# Altium PCB debugger.PcbDoc (part 2 of 2)
Units mm, origin at the board's own origin, x right, y up, seen from the top; angles counter-clockwise.
Board outline 42.72 x 30.76 mm, 2 copper layers (Top Layer, Bottom Layer); 55 components, 51 nets, 242 pads, 80 vias.
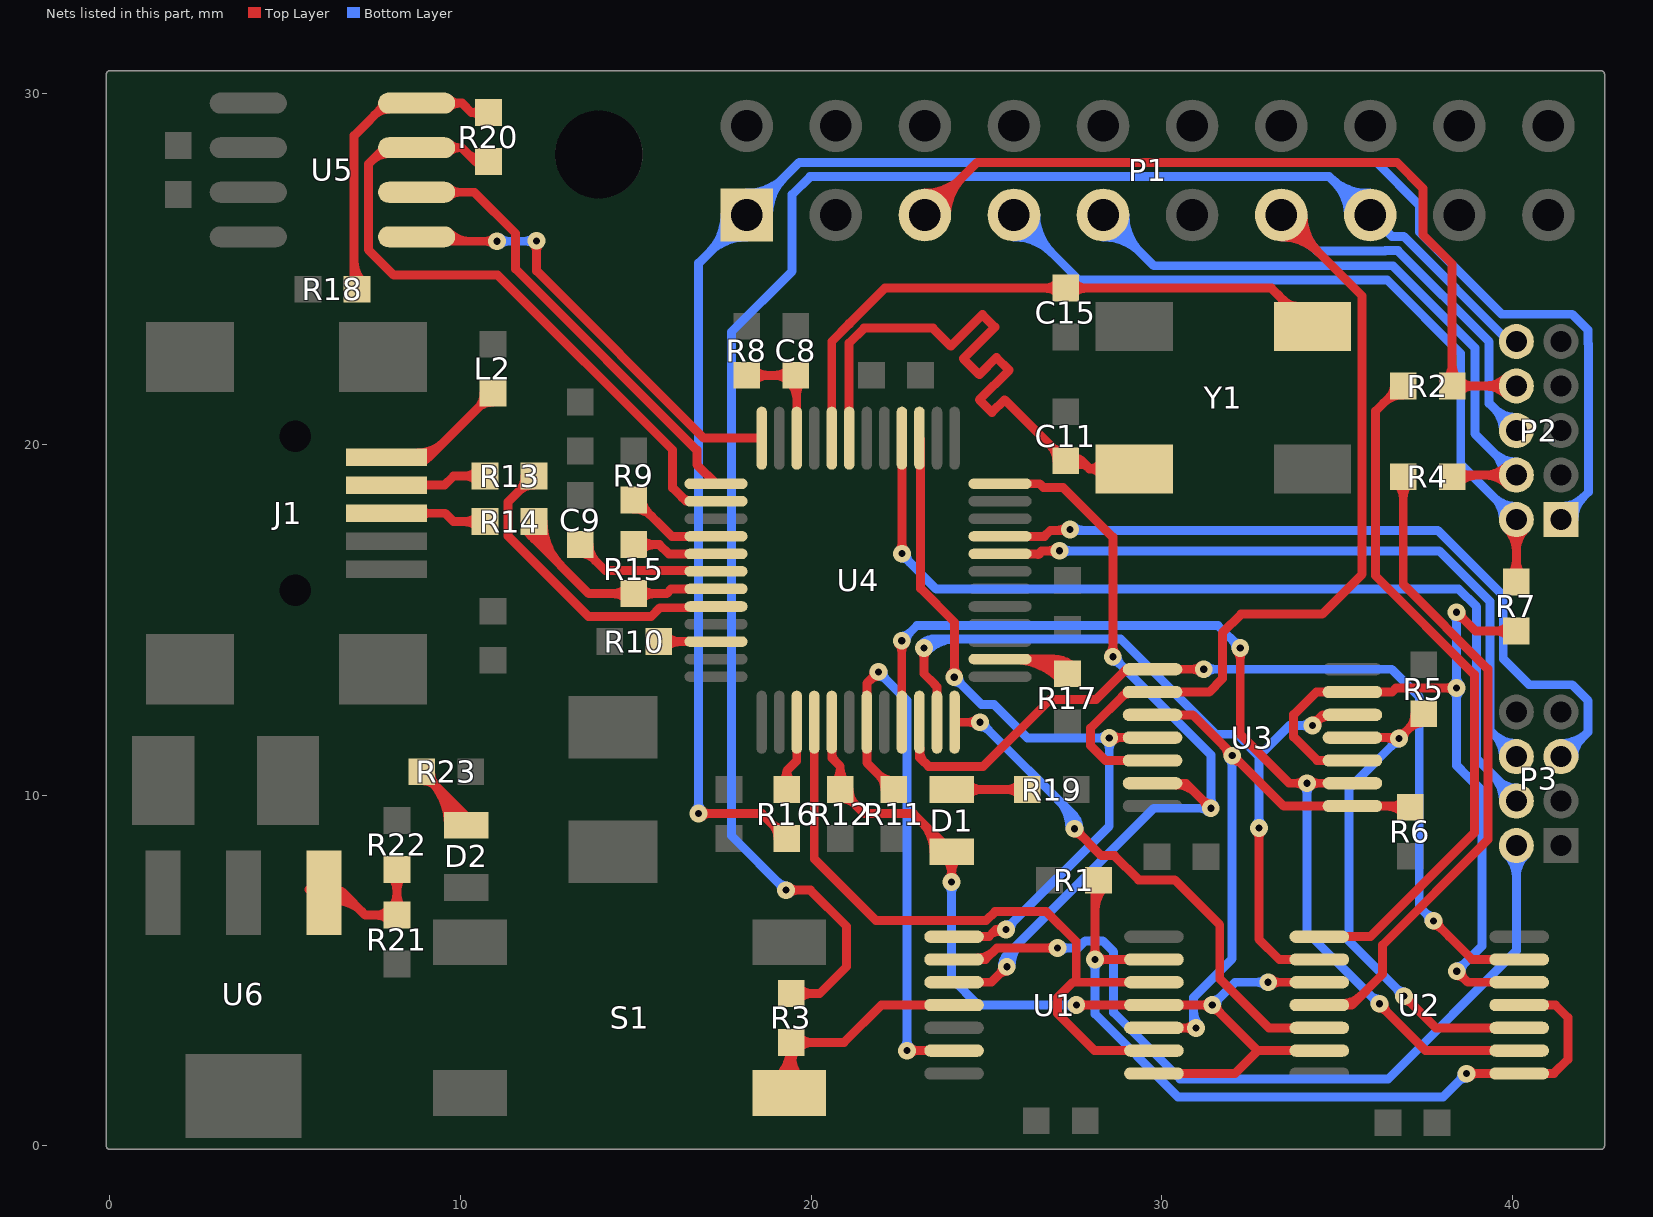
[diagram p2: the nets of this part, all layers, seen from the top]

## Via types
v1: diameter 0.508, hole 0.203, Top Layer to Bottom Layer, tented both sides, 80 vias

## Nets (pads, with @x,y where several pads share a name; then routed paths per layer and width w, separated by ;. In a path a pad name is that pad's centre, name@x,y a point inside that pad or via, vN(x,y) a via of type N, cw(c..) or ccw(c..) an arc to the next point about the centre after c; other vN are vias at no path point) (continued)
DBG1: P3.5 U4.33 | length 23.9
  Top Layer w0.254: U4.33@25.386,17.379 26.65,17.379 26.822,17.551 27.407,17.551 v1(27.381,17.577) ; 27.013,17.551 ccw(c27.013,17.945) v1@27.291,17.667
  Bottom Layer w0.254: v1(27.381,17.577) 27.407,17.551 37.864,17.551 39.734,15.682 39.734,13.886 40.473,13.147 41.698,13.147 42.154,12.692 42.154,11.801 P3.5@41.453,11.1 ; v1@27.471,17.667 ccw(c27.749,17.945) 27.749,17.551 ; P3.5@41.377,11.473 ccw(c41.377,12.557) 42.143,11.79 ; P3.5@41.75,11.1 cw(c42.466,11.1) 41.959,11.606
DBG2: P3.6 U4.32 | length 22
  Top Layer w0.254: U4.32@25.386,16.879 26.48,16.879 ; 26.467,16.866 26.48,16.879 ; 26.506,16.879 26.48,16.879 ; v1@26.987,16.877 ccw(c26.77,16.661) 26.77,16.967 ccw(c26.77,17.274) v1@26.987,17.057 ; v1(27.076,16.967) 26.568,16.967 26.48,16.879
  Bottom Layer w0.254: v1(27.076,16.967) 37.909,16.967 39.353,15.524 39.353,11.854 P3.6@40.107,11.1 ; v1@27.166,16.877 cw(c27.383,16.661) 27.383,16.967 cw(c27.383,17.274) v1@27.166,17.057 ; P3.6@39.734,11.1 ccw(c38.833,11.1) 39.47,11.737 ccw(c40.107,12.373) P3.6@40.107,11.473 ; P3.6@40.145,11.138 40.183,11.1 P3.6@40.183,11.271
DBGENN: D1.2 R12.1 U1.1 U1.4 U2.10 U2.13 U4.17 | length 36.7
  Top Layer w0.254: U4.17@20.586,12.079 20.586,11.062 20.828,10.82 R12.1@20.828,10.16 21.514,9.474 22.911,9.474 D1.2@24.003,8.382 ; U4.17@20.608,11.322 ccw(c20.949,11.208) 20.695,10.954 ; R12.1@20.648,10.34 ccw(c20.215,10.773) 20.828,10.773 ccw(c21.441,10.773) R12.1@21.008,10.34 ; R12.1@20.828,9.906 cw(c20.828,9.293) 21.262,9.726 cw(c21.695,10.16) R12.1@21.082,10.16 ; 23.136,9.249 cw(c22.269,8.382) D1.2@23.495,8.382 ; 23.569,8.816 cw(c23.136,8.382) D1.2@23.749,8.382 ; D1.2@23.823,8.202 cw(c23.39,7.769) 24.003,7.769 cw(c24.616,7.769) D1.2@24.183,8.202 ; v1@23.913,7.608 ccw(c23.696,7.825) 24.003,7.825 ccw(c24.31,7.825) v1@24.093,7.608 ; v1(24.003,7.518) D1.2@24.003,8.382 ; D1.2@24.003,8.407 D1.2@24.003,8.382 ; v1(27.559,4.013) U1.4@29.774,4.013 v1(31.436,4.013) 32.736,2.713 ; v1@27.649,3.923 cw(c27.866,3.707) 27.866,4.013 cw(c27.866,4.32) v1@27.649,4.103 ; U1.1@29.774,2.063 32.086,2.063 32.736,2.713 ; v1@31.346,3.923 ccw(c31.129,3.707) 31.129,4.013 ccw(c31.129,4.32) v1@31.346,4.103 ; v1@31.436,3.886 cw(c31.436,3.58) 31.653,3.796 cw(c31.87,4.013) v1@31.563,4.013 ; 32.974,2.713 33.122,2.713 ; v1(33.03,4.663) U2.10@34.488,4.663 ; v1@33.12,4.573 cw(c33.337,4.357) 33.337,4.663 cw(c33.337,4.97) v1@33.12,4.753 ; U2.13@34.488,2.713 33.122,2.713 ; 32.736,2.713 33.122,2.713
  Bottom Layer w0.254: v1@23.913,7.429 cw(c23.696,7.212) 24.003,7.212 cw(c24.31,7.212) v1@24.093,7.429 ; v1(24.003,7.518) 24.003,4.775 24.765,4.013 v1(27.559,4.013) ; v1@27.469,3.923 ccw(c27.252,3.707) 27.252,4.013 ccw(c27.252,4.32) v1@27.469,4.103 ; v1(31.436,4.013) 32.086,4.663 v1(33.03,4.663) ; v1@31.436,4.14 ccw(c31.436,4.447) 31.653,4.23 ccw(c31.87,4.013) v1@31.563,4.013 ; v1@32.941,4.573 ccw(c32.724,4.357) 32.724,4.663 ccw(c32.724,4.97) v1@32.941,4.753
DBGMOD: U1.2 U1.5 U4.16 | length 20.3
  Top Layer w0.254: U4.16@20.086,12.079 20.086,8.184 21.844,6.426 24.988,6.426 25.242,6.68 26.703,6.68 27.557,5.826 27.557,4.675 27.545,4.663 ; U1.2@29.774,2.713 28.083,2.713 27.028,3.768 27.028,4.233 27.458,4.663 27.545,4.663 ; U1.5@29.774,4.663 27.545,4.663
DBGRSTN: R11.1 U1.13 U4.19 | length 19.2
  Top Layer w0.254: v1@21.79,13.516 cw(c21.483,13.516) 21.7,13.299 cw(c21.917,13.082) v1@21.917,13.389 ; v1(21.917,13.516) 21.586,13.185 U4.19@21.586,12.079 21.586,10.926 R11.1@22.352,10.16 ; R11.1@22.098,10.16 ccw(c21.485,10.16) 21.918,10.594 ccw(c22.352,11.027) R11.1@22.352,10.414 ; v1(22.728,2.713) U1.13@24.074,2.713 ; v1@22.818,2.623 cw(c23.035,2.407) 23.035,2.713 cw(c23.035,3.02) v1@22.818,2.803
  Bottom Layer w0.254: v1@21.917,13.389 cw(c21.917,13.082) 22.134,13.299 cw(c22.351,13.516) v1@22.044,13.516 ; v1(21.917,13.516) 22.728,12.705 v1(22.728,2.713) ; v1@22.639,2.803 ccw(c22.422,3.02) 22.728,3.02 ccw(c23.035,3.02) v1@22.818,2.803
EECS: U4.48 U5.1 | length 15.3
  Top Layer w0.254: U5.1@8.746,25.795 v1(11.041,25.795) ; U5.1@9.669,26.044 ccw(c10.27,26.646) 10.27,25.795 ; v1@10.951,25.705 ccw(c10.735,25.488) 10.735,25.795 ccw(c10.735,26.102) v1@10.951,25.885 ; v1@12.077,25.717 cw(c11.86,25.5) 12.167,25.5 cw(c12.473,25.5) v1@12.256,25.717 ; v1(12.167,25.806) 12.167,24.948 16.936,20.179 U4.48@18.586,20.179
  Bottom Layer w0.254: v1(11.041,25.795) v1@12.167,25.795 ; v1@11.131,25.705 cw(c11.348,25.488) 11.348,25.795 cw(c11.348,26.102) v1@11.131,25.885 ; 11.832,25.795 ccw(c11.832,26.141) v1@12.077,25.896 ; 11.888,25.795 cw(c11.888,25.527) v1@12.077,25.717
EEDATA: R20.2 U4.2 U5.3 | length 22
  Top Layer w0.254: 7.465,28.09 cw(c7.946,27.608) U5.3@7.946,28.289 ; U5.3@8.746,28.335 7.71,28.335 7.369,27.994 7.369,25.556 8.096,24.829 11.061,24.829 16.048,19.842 16.048,18.763 16.432,18.379 U4.2@17.286,18.379 ; U5.3@8.746,28.462 10.033,28.462 10.428,28.067 R20.2@10.795,28.067 cw(c10.612,28.283) 10.412,28.083 ; U5.3@9.669,28.34 cw(c9.964,28.044) 9.964,28.462 cw(c9.964,28.88) U5.3@9.669,28.584 ; 10.217,28.278 ccw(c10.433,28.495) R20.2@10.631,28.261 ; 16.319,18.492 ccw(c16.536,18.708) U4.2@16.536,18.402
EESK: U4.1 U5.2 | length 13.5
  Top Layer w0.254: U5.2@8.746,27.192 10.395,27.192 11.572,26.015 11.572,25.004 16.739,19.837 16.739,19.426 U4.1@17.286,18.879 ; U5.2@9.669,27.07 cw(c9.964,26.774) 9.964,27.192 cw(c9.964,27.61) U5.2@9.669,27.314
FT_CS: U2.2 U3.2 U4.21 | length 34.7
  Top Layer w0.254: v1@22.491,14.312 cw(c22.274,14.095) 22.581,14.095 cw(c22.887,14.095) v1@22.67,14.312 ; U4.21@22.581,12.079 v1(22.581,14.402) ; v1@32.143,14.109 cw(c31.926,13.892) 32.233,13.892 cw(c32.539,13.892) v1@32.322,14.109 ; v1(32.233,14.199) 32.233,11.735 33.628,10.339 v1(34.138,10.339) U3.2@35.433,10.339 ; v1@34.048,10.249 ccw(c33.831,10.032) 33.831,10.339 ccw(c33.831,10.646) v1@34.048,10.429 ; v1@34.227,10.249 cw(c34.444,10.032) 34.444,10.339 cw(c34.444,10.646) v1@34.227,10.429 ; v1@36.208,3.924 cw(c36.208,3.679) 36.381,3.852 ; v1@36.208,4.026 37.52,2.713 U2.2@40.188,2.713 ; v1@36.335,4.051 ccw(c36.703,4.051) 36.442,3.791
  Bottom Layer w0.254: v1(22.581,14.402) 23.016,14.837 31.594,14.837 v1(32.233,14.199) ; v1@22.581,14.529 ccw(c22.581,14.835) 22.797,14.619 ccw(c23.014,14.402) v1@22.708,14.402 ; v1@32.106,14.199 ccw(c31.799,14.199) 32.016,14.415 ccw(c32.233,14.632) v1@32.233,14.326 ; v1@34.048,10.249 cw(c33.831,10.032) 34.138,10.032 cw(c34.444,10.032) v1@34.227,10.249 ; v1(34.138,10.339) 34.138,6.096 v1@36.195,4.039 ; 35.948,4.286 ccw(c36.208,4.546) v1@36.208,4.178 ; 36.009,4.225 cw(c35.835,4.051) v1@36.081,4.051
  other v1: 36.208,4.051
FT_DI: U2.6 U3.8 U4.22 | length 28.9
  Top Layer w0.254: U4.22@23.086,12.079 23.086,11.077 23.345,10.818 24.904,10.818 26.809,12.723 28.115,12.723 28.981,13.589 U3.8@29.733,13.589 v1(31.191,13.589) ; U4.22@23.108,11.324 ccw(c23.51,11.235) 23.219,10.944 ; 28.845,13.453 cw(c29.058,13.24) U3.8@29.058,13.541 ; v1@31.101,13.499 ccw(c30.885,13.282) 30.885,13.589 ccw(c30.885,13.896) v1@31.101,13.679 ; v1@37.742,6.289 cw(c37.742,5.982) 37.959,6.199 cw(c38.175,6.416) v1@37.869,6.416 ; v1(37.742,6.416) 38.189,5.969 38.191,5.969 38.846,5.313 U2.6@40.188,5.313
  Bottom Layer w0.254: v1(31.191,13.589) 36.551,13.589 37.338,12.802 37.338,6.82 v1(37.742,6.416) ; v1@31.281,13.499 cw(c31.498,13.282) 31.498,13.589 cw(c31.498,13.896) v1@31.281,13.679 ; v1@37.615,6.416 ccw(c37.308,6.416) 37.525,6.633 ccw(c37.742,6.849) v1@37.742,6.543
FT_DO: U2.9 U3.5 U4.23 | length 28.4
  Top Layer w0.254: v1@23.126,14.109 cw(c22.909,13.892) 23.216,13.892 cw(c23.522,13.892) v1@23.305,14.109 ; v1(23.216,14.199) 23.216,13.462 23.52,13.157 ; 23.495,13.183 23.52,13.157 ; U4.23@23.586,12.079 23.586,13.092 23.52,13.157 ; v1@32.676,8.974 cw(c32.459,8.757) 32.766,8.757 cw(c33.073,8.757) v1@32.856,8.974 ; v1@32.741,9.089 v1(32.766,9.064) 32.766,5.893 33.346,5.313 U2.9@34.488,5.313 ; v1(34.29,11.989) 34.59,12.289 U3.5@35.433,12.289 ; v1@34.29,12.116 ccw(c34.29,12.422) 34.507,12.206 ccw(c34.724,11.989) v1@34.417,11.989 ; v1@34.39,12.088 cw(c34.758,11.72) U3.5@34.758,12.241
  Bottom Layer w0.254: v1@23.126,14.288 cw(c23.531,13.883) 23.531,14.456 ; v1(23.216,14.199) 23.473,14.456 28.82,14.456 31.541,11.735 32.145,11.735 32.766,11.114 ; v1@23.216,14.326 ccw(c23.216,14.632) 23.432,14.415 ccw(c23.649,14.199) v1@23.343,14.199 ; v1@23.305,14.109 cw(c24.144,13.27) 24.144,14.456 ; v1@32.676,9.153 ccw(c32.459,9.37) 32.766,9.37 ccw(c33.073,9.37) v1@32.856,9.153 ; v1(32.766,9.064) 32.766,11.114 ; v1@34.2,11.899 ccw(c33.983,11.682) 33.983,11.989 ccw(c33.983,12.295) v1@34.2,12.079 ; v1(34.29,11.989) 33.641,11.989 32.766,11.114
FT_SK: U2.12 U4.24 | length 18.4
  Top Layer w0.254: U4.24@24.086,12.079 v1(24.816,12.079) v1@24.853,12.079 ; v1@24.726,11.989 ccw(c24.509,11.772) 24.509,12.079 ccw(c24.509,12.386) v1@24.726,12.169 ; v1@27.508,8.915 cw(c27.508,8.609) 27.725,8.826 cw(c27.942,9.042) v1@27.635,9.042 ; v1(27.508,9.042) 28.276,8.275 28.642,8.275 29.335,7.582 30.366,7.582 31.648,6.299 31.648,4.761 33.046,3.363 U2.12@34.488,3.363
  Bottom Layer w0.254: v1@24.816,11.952 cw(c24.816,11.618) 25.052,11.854 ; v1(24.816,12.079) v1@24.827,12.079 ; v1@24.838,12.079 v1@24.827,12.079 ; v1@24.943,12.079 ccw(c25.222,12.079) 25.025,11.882 ; 27.04,9.866 cw(c26.216,9.042) v1@27.381,9.042 ; v1@27.418,9.132 ccw(c27.202,9.349) 27.508,9.349 ccw(c27.815,9.349) v1@27.598,9.132 ; 27.474,9.433 cw(c27.083,9.042) v1@27.635,9.042 ; v1(27.508,9.042) 27.508,9.398 v1@24.827,12.079
NetC8_2: C8.2 R8.2 U4.46 | length 6.1
  Top Layer w0.254: R8.2@18.161,21.971 C8.2@19.558,21.971 19.586,21.943 U4.46@19.586,20.179 ; R8.2@18.341,21.791 cw(c18.774,21.358) 18.774,21.971 cw(c18.774,22.584) R8.2@18.341,22.151 ; C8.2@19.378,22.151 cw(c18.945,22.584) 18.945,21.971 cw(c18.945,21.358) 19.378,21.791 cw(c18.877,21.29) 19.586,21.29 ; 19.586,21.425 cw(c20.104,21.425) C8.2@19.738,21.791
NetC9_2: C9.2 U4.6 | length 5.1
  Top Layer w0.254: C9.2@13.411,16.891 cw(c13.411,16.339) 13.801,16.729 ; C9.2@13.538,17.145 13.538,16.993 14.125,16.406 17.259,16.406 U4.6@17.286,16.379 ; C9.2@13.665,17.145 ccw(c14.34,17.145) 13.863,16.668
NetD1_1: D1.1 R19.2 | length 3.5
  Top Layer w0.254: D1.1@24.437,9.98 cw(c24.87,9.547) 24.87,10.16 cw(c24.87,10.773) D1.1@24.437,10.34 ; 24.638,10.16 R19.2@26.162,10.16 ; R19.2@25.982,9.98 ccw(c25.549,9.547) 25.549,10.16 ccw(c25.549,10.773) R19.2@25.982,10.34
NetD2_1: D2.1 R23.2 | length 5.9
  Top Layer w0.254: R23.2@8.89,10.414 cw(c8.89,9.801) 9.324,10.234 cw(c9.757,10.668) R23.2@9.144,10.668 ; R23.2@8.89,10.668 10.16,9.398 D2.1@10.16,9.144 ccw(c9.547,9.144) 9.98,9.578 ; R23.2@9.113,10.445 cw(c7.812,9.144) D2.1@9.652,9.144 ; 9.547,10.011 cw(c8.68,9.144) D2.1@9.906,9.144
NetR1_1: R1.1 U1.6 U2.1 U2.4 | length 26.5
  Top Layer w0.254: v1@28.003,5.403 ccw(c27.786,5.62) 28.092,5.62 ccw(c28.399,5.62) 28.182,5.403 ccw(c28.399,5.62) 28.399,5.313 ccw(c28.399,5.007) v1@28.182,5.223 ; R1.1@28.014,7.39 cw(c27.826,7.201) R1.1@28.092,7.201 ; 28.092,6.711 cw(c29.052,6.711) R1.1@28.374,7.39 ; R1.1@28.194,7.569 28.092,7.468 v1(28.092,5.313) U1.6@29.774,5.313 ; v1(38.684,2.057) 38.69,2.063 U2.1@40.188,2.063 41.179,2.063 41.58,2.464 41.58,3.658 41.224,4.013 U2.4@40.188,4.013 ; v1@38.774,1.968 cw(c39.005,1.737) 39.005,2.063 ; v1@38.774,2.147 ccw(c38.977,2.35) 38.977,2.063
  Bottom Layer w0.254: v1@28.003,5.223 cw(c27.786,5.007) 28.092,5.007 cw(c28.399,5.007) v1@28.182,5.223 ; v1(28.092,5.313) 28.092,3.761 30.457,1.397 38.024,1.397 v1(38.684,2.057) ; v1@38.557,2.057 cw(c38.251,2.057) 38.467,1.841 cw(c38.684,1.624) v1@38.684,1.93
NetR2_1: R2.1 U2.8 | length 21.1
  Top Layer w0.254: U2.8@34.488,5.963 35.946,5.963 38.913,8.93 38.913,13.437 36.091,16.258 36.091,20.953 36.805,21.666 R2.1@36.805,21.528 ; 36.317,21.179 cw(c36.881,20.615) R2.1@36.881,21.412 ; R2.1@36.501,21.363 ccw(c36.198,21.666) R2.1@36.627,21.666 ; R2.1@36.797,21.674 36.835,21.712 R2.1@36.881,21.757
NetR3_1: R3.1 S1.2 U1.11 | length 11.4
  Top Layer w0.254: S1.2@18.998,1.876 ccw(c17.953,2.921) R3.1@19.431,2.921 ; S1.2@19.178,1.697 ccw(c18.567,2.308) 19.431,2.308 ; R3.1@19.251,2.767 cw(c18.818,2.333) 19.431,2.333 cw(c20.044,2.333) 19.611,2.767 cw(c20.044,2.333) 20.044,2.946 cw(c20.044,3.56) R3.1@19.611,3.126 ; S1.2@19.368,1.506 19.431,1.569 R3.1@19.431,2.946 20.244,2.946 ; R3.1@19.431,2.617 ccw(c20.479,2.617) S1.2@19.738,1.876 ; 20.523,2.946 20.244,2.946 ; U1.11@24.074,4.013 21.996,4.013 20.93,2.946 20.244,2.946
NetR4_1: R4.1 U2.11 | length 20.7
  Top Layer w0.254: U2.11@34.488,4.013 35.408,4.013 36.29,4.895 36.29,5.722 39.294,8.726 39.294,13.594 36.881,16.007 R4.1@36.881,18.895 ; U2.11@35.163,4.061 ccw(c35.163,4.768) 35.662,4.268 ; R4.1@36.701,18.896 cw(c36.268,18.462) 36.881,18.462 cw(c37.494,18.462) R4.1@37.06,18.896 ; R4.1@37.059,19.075 R4.1@36.881,19.075 ; R4.1@36.881,18.895 36.791,18.985 36.7,19.075 R4.1@36.881,19.075 ; R4.1@36.881,18.895 R4.1@36.881,19.075
NetR5_2: R5.2 U2.3 U3.4 | length 17.8
  Top Layer w0.254: U3.4@35.433,11.639 36.785,11.639 R5.2@37.465,12.319 ; 36.398,11.639 cw(c36.398,11.252) v1@36.672,11.526 ; v1@36.761,11.742 ccw(c36.761,12.049) 36.978,11.832 ccw(c37.195,11.615) v1@36.888,11.615 ; v1@36.906,4.14 cw(c36.906,3.834) 37.123,4.05 cw(c37.34,4.267) v1@37.033,4.267 ; v1(36.906,4.267) 37.81,3.363 U2.3@40.188,3.363 ; R5.2@37.211,12.319 cw(c36.598,12.319) 37.031,11.885 cw(c37.465,11.452) R5.2@37.465,12.065
  Bottom Layer w0.254: v1@36.634,11.615 cw(c36.328,11.615) 36.545,11.399 cw(c36.761,11.182) v1@36.761,11.488 ; v1@36.779,4.267 ccw(c36.473,4.267) 36.689,4.484 ccw(c36.906,4.701) v1@36.906,4.394 ; v1@36.779,11.633 v1(36.761,11.615) 35.331,10.185 35.331,5.842 v1(36.906,4.267)
NetR6_2: R6.2 U1.3 U3.1 U3.10 | length 20.9
  Top Layer w0.254: U3.10@29.733,12.289 30.878,12.289 33.478,9.689 U3.1@35.433,9.689 37.047,9.689 R6.2@37.084,9.652 ; U1.3@29.774,3.363 v1(30.973,3.363) ; v1@30.883,3.273 ccw(c30.666,3.057) 30.666,3.363 ccw(c30.666,3.67) v1@30.883,3.453 ; 31.761,11.406 cw(c31.479,11.125) v1@31.877,11.125 ; v1@32.004,10.998 cw(c32.004,10.601) 32.285,10.882 ; 36.381,9.689 cw(c36.381,8.949) R6.2@36.904,9.472 ; 36.56,9.689 ccw(c36.56,10.176) R6.2@36.904,9.832
  Bottom Layer w0.254: 30.905,3.834 ccw(c31.444,3.834) v1@31.063,3.453 ; v1(30.973,3.363) 30.905,3.431 30.905,4.235 32.004,5.334 v1(32.004,11.125) v1@32.004,11.163 ; v1@31.914,11.035 cw(c31.697,10.819) 32.004,10.819 cw(c32.311,10.819) v1@32.094,11.035
NetR7_1: R7.1 U2.5 U3.3 U3.6 | length 27.4
  Top Layer w0.254: U3.3@35.433,10.989 34.426,10.989 33.757,11.659 33.757,12.294 34.402,12.939 U3.6@35.433,12.939 36.561,12.939 36.68,13.058 v1@38.28,13.058 ; 38.092,13.058 cw(c38.092,12.743) v1@38.315,12.966 ; 38.104,13.058 ccw(c38.104,13.356) v1@38.315,13.145 ; v1(38.405,13.056) 38.283,13.056 v1@38.28,13.058 ; v1@38.405,15.088 cw(c38.405,14.781) 38.622,14.998 cw(c38.838,15.215) v1@38.532,15.215 ; v1(38.405,15.215) 38.938,14.681 R7.1@40.107,14.681 ; v1@38.407,4.851 cw(c38.407,4.545) 38.624,4.762 cw(c38.841,4.978) v1@38.534,4.978 ; v1(38.407,4.978) 38.722,4.663 U2.5@40.188,4.663 ; R7.1@39.927,14.502 ccw(c39.493,14.068) 39.493,14.681 ccw(c39.493,15.294) R7.1@39.927,14.861 ; v1@38.28,13.058 38.405,13.058 38.407,13.058 38.405,13.06 38.278,13.06 v1@38.28,13.058
  Bottom Layer w0.254: v1@38.315,12.966 cw(c38.098,12.749) 38.405,12.749 cw(c38.711,12.749) v1@38.495,12.966 ; v1@38.315,13.145 ccw(c38.098,13.362) 38.405,13.362 ccw(c38.711,13.362) v1@38.495,13.145 ; v1@38.315,15.125 cw(c38.098,14.908) 38.405,14.908 cw(c38.711,14.908) v1@38.495,15.125 ; v1@38.405,13.06 v1@38.407,13.058 ; v1(38.405,15.215) 38.405,13.183 38.341,13.119 38.278,13.056 38.341,12.992 38.405,12.929 38.405,10.846 38.71,10.541 ; v1(38.407,4.978) 39.13,5.701 39.13,10.121 38.71,10.541 ; v1@38.407,5.105 ccw(c38.407,5.412) 38.624,5.195 ccw(c38.841,4.978) v1@38.534,4.978 ; 38.407,10.843 38.71,10.541
NetR10_1: R10.1 U4.10 | length 2.6
  Top Layer w0.254: R10.1@15.649,14.379 U4.10@17.286,14.379 ; R10.1@15.829,14.199 cw(c16.262,13.766) 16.262,14.379 cw(c16.262,14.992) R10.1@15.829,14.559
NetR13_2: R13.2 U4.8 | length 10
  Top Layer w0.254: R13.2@11.843,19.1 cw(c11.23,19.1) 11.663,18.666 cw(c12.097,18.233) R13.2@12.097,18.846 ; R13.2@12.097,19.1 11.358,18.361 11.358,17.385 13.653,15.09 15.431,15.09 15.685,15.344 17.251,15.344 U4.8@17.286,15.379
NetR14_2: R14.2 R15.1 U4.7 | length 12.3
  Top Layer w0.254: R14.2@11.843,17.8 ccw(c12.424,17.8) 12.013,17.389 ; R14.2@12.351,17.8 ccw(c14.158,17.8) 12.88,16.522 ; 12.447,16.956 cw(c13.291,17.8) R14.2@12.097,17.8 12.097,17.305 ; R15.1@14.756,15.568 ccw(c14.322,15.135) 14.322,15.748 ccw(c14.322,16.361) R15.1@14.756,15.928 ; R15.1@14.935,15.748 13.654,15.748 12.097,17.305 ; R15.1@15.113,15.748 15.875,15.748 16.006,15.879 U4.7@17.286,15.879 ; R15.1@15.115,15.568 cw(c15.548,15.135) 15.548,15.748 cw(c15.548,16.361) R15.1@15.115,15.928 ; 12.097,17.305 cw(c12.451,17.305) 12.245,17.594 ccw(c12.451,17.305) 12.097,17.305 ; 12.097,17.305 ccw(c11.743,17.305) 11.949,17.594 cw(c11.743,17.305) 12.097,17.305
NetR15_2: R15.2 U4.5 | length 3.4
  Top Layer w0.254: R15.2@14.935,17.145 15.672,17.145 15.938,16.879 U4.5@17.286,16.879 ; R15.2@15.115,16.965 cw(c15.548,16.532) 15.548,17.145 cw(c15.548,17.758) R15.2@15.115,17.325
NetR16_1: R16.1 U4.15 | length 2.8
  Top Layer w0.254: R16.1@19.144,10.357 ccw(c18.871,10.693) 19.304,10.693 ; R16.1@19.304,10.16 19.304,10.693 ; R16.1@19.464,10.357 cw(c19.737,10.693) 19.304,10.693 ; U4.15@19.586,12.079 19.586,10.975 19.304,10.693
NetR17_1: R17.1 U4.26 | length 6.4
  Top Layer w0.254: U4.26@25.386,13.879 26.888,13.879 ; U4.26@25.685,13.879 cw(c25.685,11.842) R17.1@27.125,13.282 ; 26.298,13.879 cw(c26.298,12.455) R17.1@27.305,13.462 26.888,13.879 ; 26.911,13.879 cw(c26.911,13.068) R17.1@27.485,13.642 ; R17.1@27.051,13.469 ccw(c26.494,13.485) 26.888,13.879 ; R17.1@27.298,13.716 cw(c27.282,14.273) 26.888,13.879
NetR18_1: R18.1 R20.1 U5.4 | length 11.8
  Top Layer w0.254: R18.1@6.867,24.607 ccw(c6.629,24.845) 6.965,24.845 ; 6.965,25.236 ccw(c7.855,25.236) R18.1@7.226,24.607 ; R18.1@7.046,24.3 6.965,24.381 6.965,28.809 7.888,29.732 U5.4@8.746,29.732 10.044,29.732 10.312,29.464 ; 7.552,29.396 cw(c7.946,29.001) U5.4@7.946,29.559 ; 7.692,29.536 ccw(c7.496,29.732) U5.4@7.773,29.732 ; U5.4@9.669,29.61 cw(c9.964,29.314) 9.964,29.732 cw(c9.964,30.15) U5.4@9.669,29.854 ; R20.1@10.586,29.32 ccw(c10.312,29.132) 10.312,29.464 ; R20.1@10.586,29.608 cw(c10.312,29.796) 10.312,29.464 ; R20.1@10.795,29.464 10.312,29.464
NetR21_1: R21.1 R22.2 U6.1 | length 10.8
  Top Layer w0.254: U6.1@5.678,7.304 cw(c6.097,6.542) 6.711,7.157 ; U6.1@5.8,7.082 cw(c6.266,6.233) 6.951,6.918 ; U6.1@5.923,6.859 cw(c6.436,5.924) 7.19,6.678 ; U6.1@6.11,7.218 6.65,7.218 ; U6.1@6.459,7.086 cw(c6.65,7.013) 6.65,7.218 ; U6.1@6.459,7.35 ccw(c6.65,7.423) 6.65,7.218 ; R21.1@8.005,6.401 ccw(c7.572,5.967) 7.572,6.581 ccw(c7.572,7.194) 8.005,6.76 ccw(c7.572,7.194) 8.185,7.194 ccw(c8.798,7.194) R21.1@8.364,6.76 ; R22.2@8.005,7.701 cw(c7.572,7.267) 8.185,7.267 cw(c8.798,7.267) R22.2@8.364,7.701 ; R22.2@8.185,7.881 R21.1@8.185,6.581 7.288,6.581 6.65,7.218
RESETN: R9.1 U4.4 | length 3.6
  Top Layer w0.254: R9.1@14.935,18.161 cw(c14.935,17.425) 15.456,17.945 ; R9.1@15.113,18.415 15.113,18.288 16.022,17.379 U4.4@17.286,17.379 ; R9.1@15.189,18.415 ccw(c15.68,18.415) 15.333,18.068
SRSTN: P1.15 P2.10 R3.2 | length 54.7
  Top Layer w0.254: v1(19.279,7.29) 19.977,7.29 21.006,6.261 21.006,5.105 20.244,4.343 R3.2@19.431,4.343 ; v1@19.368,7.2 cw(c19.585,6.983) 19.585,7.29 cw(c19.585,7.596) v1@19.368,7.38 ; R3.2@19.611,4.164 cw(c20.044,3.73) 20.044,4.343 cw(c20.044,4.957) R3.2@19.611,4.523
  Bottom Layer w0.254: v1@19.152,7.29 ccw(c18.845,7.29) 19.062,7.507 ccw(c19.279,7.723) v1@19.279,7.417 ; v1(19.279,7.29) 17.727,8.842 17.727,23.213 19.456,24.943 19.456,27.127 19.967,27.638 34.77,27.638 35.865,26.543 P1.15@35.941,26.543 36.553,25.931 36.895,25.931 39.89,22.936 P2.10@40.107,22.936 ; 34.808,27.599 ccw(c35.859,28.65) P1.15@35.917,27.166 ; 34.931,27.476 cw(c33.998,26.543) P1.15@35.318,26.543 ; 35.219,27.189 ccw(c35.89,27.859) P1.15@35.927,26.912 ; 35.365,27.043 cw(c34.865,26.543) P1.15@35.572,26.543
SWO_EN: U1.10 U3.13 U4.36 | length 30
  Top Layer w0.254: U1.10@24.074,4.663 25.136,4.663 v1(25.578,5.105) ; U4.36@25.386,18.879 26.518,18.879 26.626,18.771 27.185,18.771 28.6,17.355 v1(28.6,13.945) ; v1@25.451,5.105 cw(c25.144,5.105) 25.361,4.889 cw(c25.578,4.672) v1@25.578,4.978 ; v1@28.511,14.034 ccw(c28.294,14.251) 28.6,14.251 ccw(c28.907,14.251) v1@28.69,14.034 ; U3.13@29.733,10.339 30.682,10.339 v1(31.394,9.627) ; U3.13@30.408,10.291 cw(c30.408,9.514) 30.958,10.063 ; U3.13@30.424,10.294 cw(c30.548,9.931) 30.819,10.202 ; v1@31.267,9.627 ccw(c30.961,9.627) 31.178,9.843 ccw(c31.394,10.06) v1@31.394,9.754
  Bottom Layer w0.254: v1@25.451,5.105 cw(c25.941,5.105) 25.594,5.452 ; v1@25.488,5.195 ccw(c25.271,5.412) 25.578,5.412 ccw(c25.884,5.412) v1@25.668,5.195 ; v1(25.578,5.105) 25.578,5.436 29.769,9.627 v1(31.394,9.627) ; v1@25.705,5.105 cw(c26.809,5.105) 26.028,5.886 ; v1@28.6,13.818 cw(c28.6,13.511) 28.817,13.728 cw(c29.034,13.945) v1@28.727,13.945 ; v1(28.6,13.945) 31.394,11.151 v1(31.394,9.627) ; v1@28.629,14.075 v1@28.68,14.024 ; v1@31.305,9.537 ccw(c31.088,9.32) 31.088,9.627 ccw(c31.088,9.933) 31.305,9.716 ccw(c31.088,9.933) 31.394,9.933 ccw(c31.701,9.933) v1@31.484,9.716 ; v1@31.394,9.601 v1(31.394,9.627)
TCK: P1.9 P2.4 R4.2 | length 25.7
  Top Layer w0.254: R4.2@38.278,19.075 38.329,19.126 P2.4@40.107,19.126 ; R4.2@38.457,18.896 cw(c39.014,18.34) 39.014,19.126 ; R4.2@38.457,19.255 ccw(c38.768,19.566) 38.768,19.126 ; P2.4@39.843,18.862 ccw(c39.206,18.226) 39.206,19.126 ccw(c39.206,20.027) P2.4@39.843,19.39
  Bottom Layer w0.254: P1.9@28.321,25.92 cw(c28.321,24.416) 29.385,25.479 cw(c30.448,26.543) P1.9@28.944,26.543 ; P1.9@28.321,26.174 cw(c28.321,25.283) 28.951,25.913 cw(c29.581,26.543) P1.9@28.69,26.543 ; P1.9@28.321,26.543 29.769,25.095 36.589,25.095 38.926,22.758 38.926,20.307 P2.4@40.107,19.126 ; P2.4@39.734,19.126 ccw(c38.833,19.126) 39.47,19.763 ccw(c40.107,20.4) P2.4@40.107,19.499
TDI: P1.5 P2.8 R2.2 | length 30.1
  Top Layer w0.254: P1.5@23.241,26.543 24.74,28.042 36.703,28.042 37.44,27.305 37.44,25.984 38.278,25.146 R2.2@38.278,21.666 ; P1.5@23.241,26.912 ccw(c23.241,27.803) 23.871,27.173 ccw(c24.501,26.543) P1.5@23.61,26.543 ; P1.5@23.241,27.166 ccw(c23.241,28.67) 24.305,27.607 ccw(c25.368,26.543) P1.5@23.864,26.543 ; R2.2@38.098,21.846 ccw(c37.665,22.279) 38.278,22.279 ccw(c38.891,22.279) 38.457,21.846 ccw(c38.891,22.279) 38.891,21.666 ccw(c38.891,21.053) R2.2@38.457,21.487 ; R2.2@38.202,21.666 R2.2@38.278,21.666 ; P2.8@39.843,21.402 ccw(c39.206,20.766) 39.206,21.666 ccw(c39.206,22.567) P2.8@39.843,21.93 ; P2.8@40.107,21.666 R2.2@38.278,21.666
TDO_SWO: P1.13 P2.6 U3.9 U3.12 | length 43.2
  Top Layer w0.254: 28.863,12.81 cw(c29.058,12.615) U3.9@29.058,12.891 ; U3.12@29.733,10.989 28.39,10.989 27.96,11.419 27.96,11.566 27.963,11.569 27.963,11.91 28.992,12.939 U3.9@29.733,12.939 31.344,12.939 31.725,13.32 31.725,14.63 32.258,15.164 34.569,15.164 35.71,16.304 35.71,24.234 ; P1.13@33.401,25.92 cw(c33.401,24.416) 34.465,25.479 cw(c35.528,26.543) P1.13@34.024,26.543 ; P1.13@33.401,26.174 cw(c33.401,25.283) 34.031,25.913 cw(c34.661,26.543) P1.13@33.77,26.543 ; P1.13@33.401,26.543 35.71,24.234 ; 35.712,24.232 35.71,24.234
  Bottom Layer w0.254: P1.13@33.401,26.543 34.428,25.516 ; P1.13@33.41,26.174 cw(c33.431,25.356) 34.009,25.935 cw(c34.588,26.513) P1.13@33.77,26.534 ; P1.13@33.417,25.92 cw(c33.451,24.539) 34.428,25.516 ; P1.13@34.024,26.527 ccw(c35.405,26.493) 34.428,25.516 ; P2.6@39.734,20.396 ccw(c38.833,20.396) 39.47,21.033 ccw(c40.107,21.67) P2.6@40.107,20.769 ; P2.6@40.107,20.396 39.33,21.173 39.33,22.925 36.728,25.527 36.377,25.527 36.366,25.516 34.428,25.516
TMS_SWDIO: P1.7 P2.2 R7.2 | length 29.1
  Top Layer w0.254: P2.2@39.843,17.592 cw(c39.206,16.956) 40.107,16.956 cw(c41.007,16.956) P2.2@40.37,17.592 ; R7.2@39.927,16.258 ccw(c39.493,16.691) 40.107,16.691 ccw(c40.72,16.691) R7.2@40.286,16.258 ; R7.2@40.107,16.078 P2.2@40.107,17.856
  Bottom Layer w0.254: P1.7@25.781,25.92 cw(c25.781,24.416) 26.845,25.479 cw(c27.908,26.543) P1.7@26.404,26.543 ; P1.7@25.781,26.174 cw(c25.781,25.283) 26.411,25.913 cw(c27.041,26.543) P1.7@26.15,26.543 ; P1.7@25.781,26.543 27.635,24.689 36.424,24.689 38.522,22.591 38.522,19.441 P2.2@40.107,17.856 ; P2.2@39.734,17.856 ccw(c38.833,17.856) 39.47,18.493 ccw(c40.107,19.13) P2.2@40.107,18.229
USBM: J1.2 R13.1 | length 4.4
  Top Layer w0.254: J1.2@7.886,18.839 9.539,18.839 9.8,19.1 R13.1@10.7,19.1 ; J1.2@8.873,18.752 cw(c9.083,18.542) 9.083,18.839 cw(c9.083,19.136) J1.2@8.873,18.926 ; R13.1@10.52,18.92 ccw(c10.087,18.487) 10.087,19.1 ccw(c10.087,19.713) R13.1@10.52,19.28
USBP: J1.3 R14.1 | length 4.3
  Top Layer w0.254: J1.3@7.886,18.039 9.561,18.039 9.8,17.8 R14.1@10.7,17.8 ; J1.3@8.873,17.952 cw(c9.083,17.742) 9.083,18.039 cw(c9.083,18.336) J1.3@8.873,18.126 ; R14.1@10.52,17.62 ccw(c10.087,17.187) 10.087,17.8 ccw(c10.087,18.413) R14.1@10.52,17.98
VBUS: J1.1 L2.1 | length 6.4
  Top Layer w0.254: J1.1@7.886,19.639 9.098,19.639 L2.1@10.922,21.463 ; J1.1@8.786,19.508 ccw(c8.786,19.945) 9.095,19.636 ; J1.1@8.786,19.762 ccw(c8.786,20.812) 9.529,20.07 ; J1.1@8.873,19.552 cw(c9.083,19.342) 9.083,19.639 cw(c9.083,19.936) J1.1@8.873,19.726 ; L2.1@10.668,21.463 cw(c10.055,21.463) 10.488,21.029 cw(c10.922,20.596) L2.1@10.922,21.209
VCP_RX: P3.4 U4.40 | length 28.7
  Top Layer w0.254: v1@22.496,16.975 ccw(c22.279,17.192) 22.586,17.192 ccw(c22.893,17.192) v1@22.676,16.975 ; v1(22.586,16.886) U4.40@22.586,20.179
  Bottom Layer w0.254: v1@22.581,16.891 22.581,16.866 23.571,15.875 38.463,15.875 38.972,15.366 38.972,11.041 P3.4@40.183,9.83 ; v1@22.586,16.759 cw(c22.586,16.513) 22.759,16.687 ; v1@22.713,16.886 ccw(c23.081,16.886) 22.821,16.625 ; 39.416,10.597 cw(c38.649,9.83) P3.4@39.734,9.83 ; 39.6,10.413 ccw(c40.107,10.919) P3.4@40.107,10.203
VCP_TX: P3.2 U1.9 | length 26.4
  Top Layer w0.254: U1.9@24.074,5.313 24.966,5.313 25.291,5.639 v1(27.026,5.639) ; U1.9@24.749,5.361 ccw(c24.749,6) 25.201,5.548 ; v1@26.936,5.549 ccw(c26.719,5.332) 26.719,5.639 ccw(c26.719,5.945) v1@26.936,5.729
  Bottom Layer w0.254: v1(27.026,5.639) 27.608,5.639 27.813,5.844 28.312,5.844 28.623,5.533 28.623,3.802 30.52,1.905 36.449,1.905 40.107,5.563 P3.2@40.107,8.56 ; v1@27.115,5.549 cw(c27.332,5.332) 27.332,5.639 cw(c27.332,5.945) v1@27.115,5.729 ; P3.2@39.843,8.296 cw(c39.206,7.659) 40.107,7.659 cw(c41.007,7.659) P3.2@40.37,8.296 ; P3.2@40.259,8.56 P3.2@40.259,8.636
VCP_TX_SWO: U1.8 U3.11 U4.39 | length 25.5
  Top Layer w0.254: U4.39@23.086,20.179 23.117,20.148 23.117,15.897 24.086,14.928 v1@24.086,13.36 ; v1@23.989,13.45 ccw(c23.756,13.683) 24.086,13.683 ; U1.8@24.074,5.963 25.044,5.963 ; 24.086,13.651 ccw(c24.369,13.651) v1@24.169,13.45 ; 25.07,5.969 25.273,6.172 ; 25.133,6.033 cw(c25.328,5.837) v1@25.482,6.067 ; v1@25.457,6.089 ccw(c25.273,5.928) 25.273,6.172 ; v1@25.457,6.256 cw(c25.273,6.416) 25.273,6.172 ; v1(25.552,6.172) 25.273,6.172 ; v1@28.499,11.639 U3.11@29.733,11.639 ; v1@28.589,11.543 cw(c28.819,11.313) 28.819,11.639 ; v1@28.589,11.723 ccw(c28.791,11.926) 28.791,11.639
  Bottom Layer w0.254: v1@24.079,13.233 cw(c24.079,12.927) 24.296,13.144 cw(c24.513,13.36) v1@24.206,13.36 ; v1(24.079,13.36) 24.853,12.587 25.208,12.587 26.162,11.633 v1(28.499,11.633) 28.499,9.119 v1(25.552,6.172) ; v1@25.552,6.299 ccw(c25.552,6.606) 25.769,6.389 ccw(c25.986,6.172) v1@25.679,6.172 ; v1@28.409,11.723 cw(c28.192,11.94) 28.192,11.633 cw(c28.192,11.327) 28.409,11.543 cw(c28.192,11.327) 28.499,11.327 cw(c28.805,11.327) v1@28.589,11.543
VSENSE: P1.1 P2.1 R16.2 | length 64.3
  Top Layer w0.254: v1(16.789,9.474) 18.593,9.474 R16.2@19.304,8.763 ; v1@16.879,9.384 cw(c17.096,9.168) 17.096,9.474 cw(c17.096,9.781) v1@16.879,9.564 ; R16.2@19.05,8.763 ccw(c18.437,8.763) 18.87,9.197 ccw(c19.304,9.63) R16.2@19.304,9.017
  Bottom Layer w0.254: v1@16.7,9.564 ccw(c16.483,9.781) 16.789,9.781 ccw(c17.096,9.781) v1@16.879,9.564 ; v1(16.789,9.474) 16.789,25.171 P1.1@18.161,26.543 19.66,28.042 36.119,28.042 37.338,26.822 37.338,26.06 39.685,23.713 41.698,23.713 42.154,23.258 42.154,22.87 42.164,22.86 42.164,18.644 P2.1@41.377,17.856 P2.1@41.377,18.027 ; P1.1@17.538,26.543 cw(c16.034,26.543) 17.097,25.479 cw(c18.161,24.416) P1.1@18.161,25.92 ; P1.1@17.792,26.543 cw(c16.901,26.543) 17.531,25.913 cw(c18.161,25.283) P1.1@18.161,26.174 ; P1.1@18.161,26.912 ccw(c18.161,27.803) 18.791,27.173 ccw(c19.421,26.543) P1.1@18.53,26.543 ; P1.1@18.161,27.166 ccw(c18.161,28.67) 19.225,27.607 ccw(c20.288,26.543) P1.1@18.784,26.543 ; P2.1@41.377,18.229 ccw(c41.377,19.13) 42.013,18.493 ccw(c42.65,17.856) P2.1@41.75,17.856
XTIN: C11.1 U4.43 Y1.1 | length 21.7
  Top Layer w0.254: U4.43@21.086,20.179 21.082,20.183 21.082,22.893 21.507,23.317 23.47,23.317 23.981,22.806 24.879,23.704 25.239,23.344 24.34,22.446 24.794,21.993 25.281,22.48 25.641,22.121 24.794,21.274 25.153,20.915 25.512,21.274 C11.1@27.254,19.533 ; C11.1@27,19.533 ccw(c26.387,19.533) 26.821,19.966 ccw(c27.254,20.4) C11.1@27.254,19.787 ; C11.1@27.423,19.343 cw(c27.662,19.077) 27.915,19.329 ; C11.1@27.464,19.675 ccw(c27.686,19.826) 27.686,19.558 ; C11.1@27.486,19.429 cw(c27.686,19.339) 27.686,19.558 ; 27.725,19.519 ccw(c27.482,19.277) C11.1@27.254,19.533 ; 27.867,19.377 ccw(c27.43,18.94) C11.1@27.254,19.533 ; Y1.1@28.284,19.078 ccw(c27.94,18.93) 27.94,19.304 ; Y1.1@28.284,19.53 cw(c27.94,19.678) 27.94,19.304 ; Y1.1@29.21,19.304 27.94,19.304 ; C11.1@27.254,19.533 27.254,19.558 27.686,19.558 ; 27.686,19.558 27.94,19.304
XTOUT: C15.1 U4.44 Y1.3 | length 21
  Top Layer w0.254: U4.44@20.586,20.179 20.586,22.935 21.088,23.438 ; 21.082,23.444 22.098,24.46 C15.1@27.254,24.46 ; C15.1@27.075,24.281 ccw(c26.641,23.847) 26.641,24.46 ccw(c26.641,25.073) C15.1@27.075,24.64 ; C15.1@27.33,24.536 C15.1@27.254,24.46 ; C15.1@27.434,24.281 cw(c27.867,23.847) 27.867,24.46 cw(c27.867,25.073) C15.1@27.434,24.64 ; 33.306,24.276 cw(c32.619,23.589) Y1.3@33.576,23.423 ; 33.465,24.117 ccw(c33.89,24.543) Y1.3@33.89,23.941 ; Y1.3@34.265,23.317 34.252,23.33 33.122,24.46 C15.1@27.254,24.46
pads on no net: J1.4 J1.7 J1.8 J1.9 J1.MH1 J1.MH2 P1.2 P1.3 P1.11 P1.17 P1.19 P2.7 S1.3 S1.4 U4.11 U4.12 U4.13 U4.20 U4.27 U4.28 U4.29 U4.30 U4.35 U4.37 U4.38 U4.41 U5.6 U5.7 U6.2 Y1.2 Y1.4

## Polygon pours and split planes (outlines as drawn)
0V on Bottom Layer "0V_b" (solid, remove dead copper, pour order 1000): 0,0 0,30.556 42.621,30.556 42.647,30.531 42.647,0
+3V3 on Top Layer "3V3_t" (solid, remove dead copper, pour order 1001): 42.647,30.556 42.647,0 0,0 0,30.556

## Keep-outs
Keep-Out Layer:
  lines w0.05: 0,0 42.647,0 42.647,30.556 0,30.556 0,0

## Other copper
Top Layer:
  rectangle net 0V: 13.005,10.922 15.723,13.564
  rectangle net 0V: 6.731,14.757 11.506,16.688
Bottom Layer:
  region: 35.331,18.745 35.331,23.876 28.143,23.876 28.143,18.745

## Silkscreen, mask and mechanical layers (free items; w line width, h text height)
Top Overlay:
  lines w0.076: 16.738,26.519 16.154,27.102 16.154,25.933 16.739,26.518 ; 41.35,16.788 40.767,16.205 41.935,16.205 41.351,16.789 ; 41.376,7.468 40.793,6.885 41.961,6.885 41.377,7.469
  text "1" at 15.392,25.933 h2
  text "JTAG/SWD" at 16.866,24.181 h1.5
  text "USB" at 2.388,23.901 h1.5
  text "JD-BUGGA" at 1.143,23.851 h1.5 r90
  text "SWD" at 38.989,22.454 h1.5 r90
  text "JTAG" at 38.989,15.469 h1.5 r90
  text "1" at 41.935,15.443 h2
  text "POWER" at 11.989,7.798 h1.5 r90
  text "DBG" at 25.883,7.214 h1.5 r90
  text "PWR/UART" at 38.989,6.807 h1.5 r90
  text "1" at 41.961,6.123 h2
  text "RESET" at 7.925,3.099 h1.5
Mechanical 1:
  lines w0.203: 0,0 0,30.556 42.647,30.556 42.647,0 0,0
  lines w0.254: -3.048,1.524 -2.54,0 ; -3.048,29.032 -2.54,30.556 ; -2.794,0 -2.286,0 ; -2.794,30.556 -2.286,30.556 ; -2.54,8.397 -2.54,0 ; -2.54,22.159 -2.54,30.556 ; -2.032,1.524 -2.54,0 ; -2.032,29.032 -2.54,30.556 ; 0,-1.676 0,-1.168 ; 1.524,-1.93 0,-1.422 ; 1.524,-0.914 0,-1.422 ; 14.556,-1.422 0,-1.422 ; 28.065,-1.422 42.621,-1.422 ; 41.097,-1.93 42.621,-1.422 ; 41.097,-0.914 42.621,-1.422 ; 42.621,-1.676 42.621,-1.168
  text "30.5562mm" at -1.626,8.651 h1.52 r90
  text "42.6212mm" at 14.81,-2.337 h1.52

## Text inside footprints (layer, text, board x,y; h text height)
J1: Mechanical 1 "PCB Edge" at -0.396,22.075 h0.25